# Altium PCB [R0] Digital - BlackChat.PcbDoc
Units mil, origin at the board's own origin, x right, y up, seen from the top; angles counter-clockwise.
Board outline 2400 x 3500 mil, 2 copper layers (Top Layer, Bottom Layer); 28 components, 77 nets, 205 pads, 9 vias.
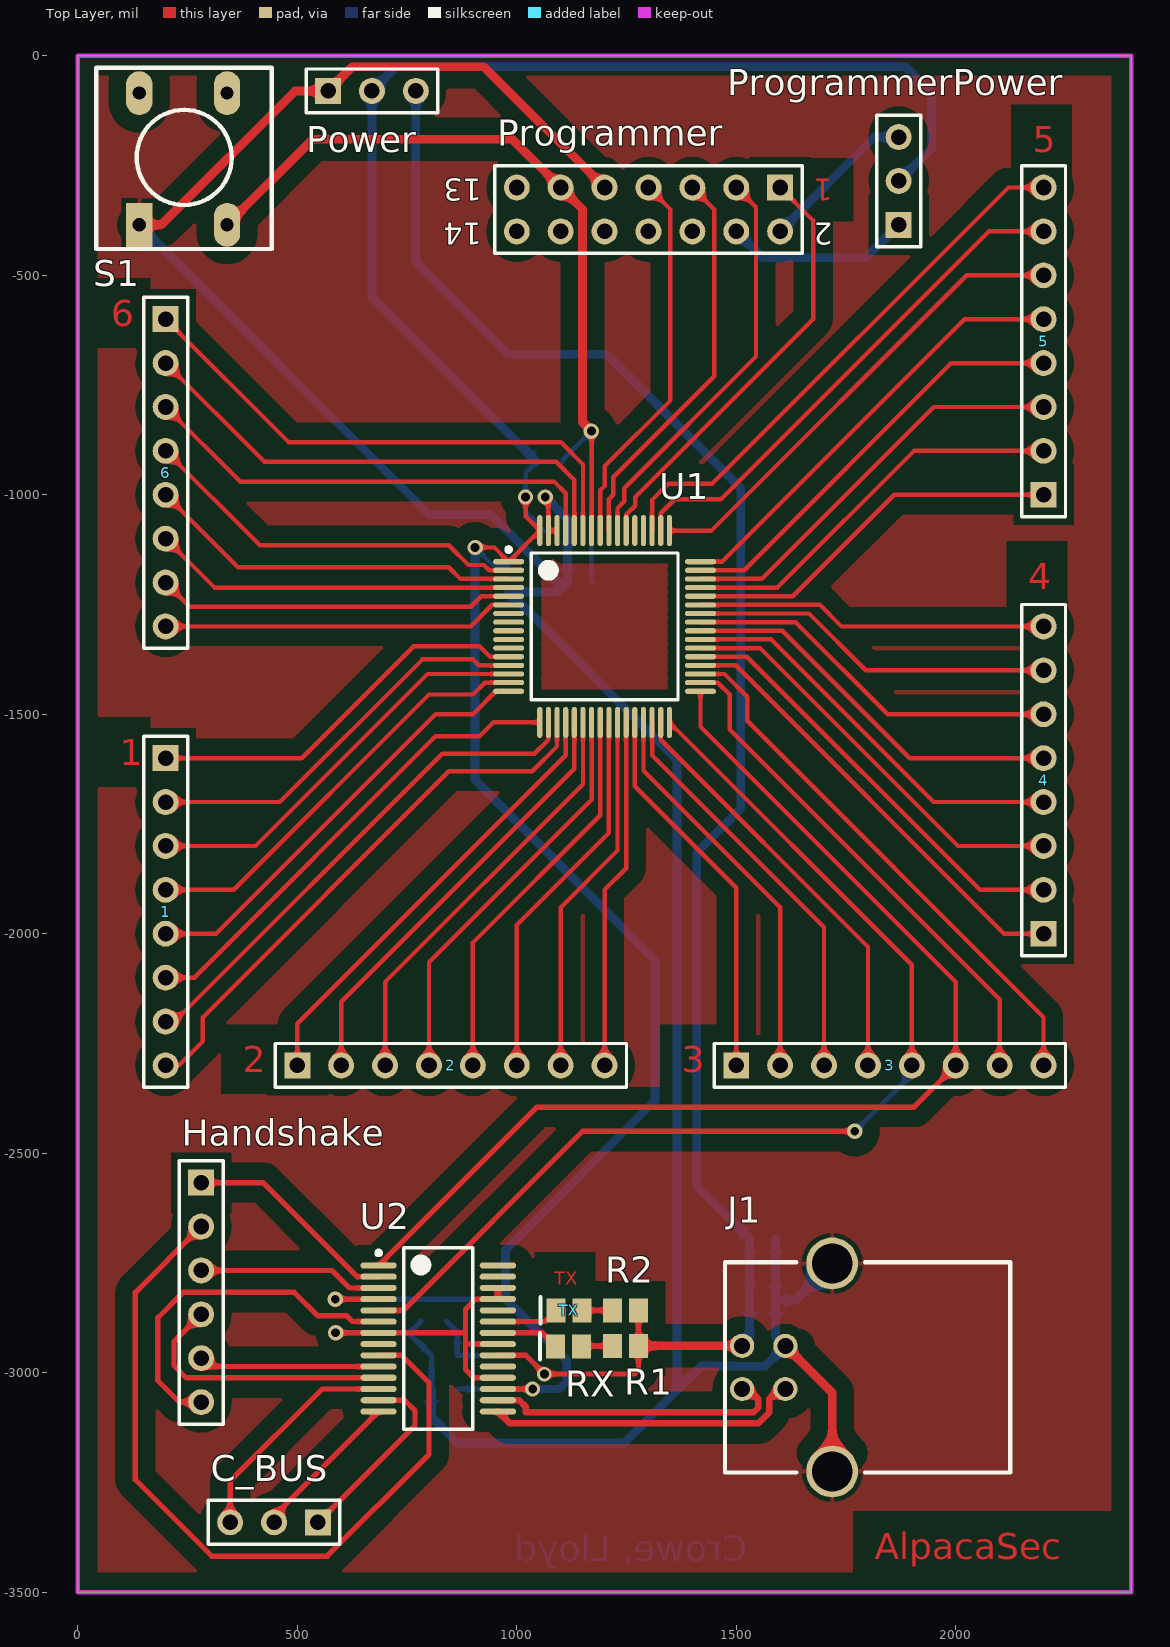
[diagram p0: Top Layer view]
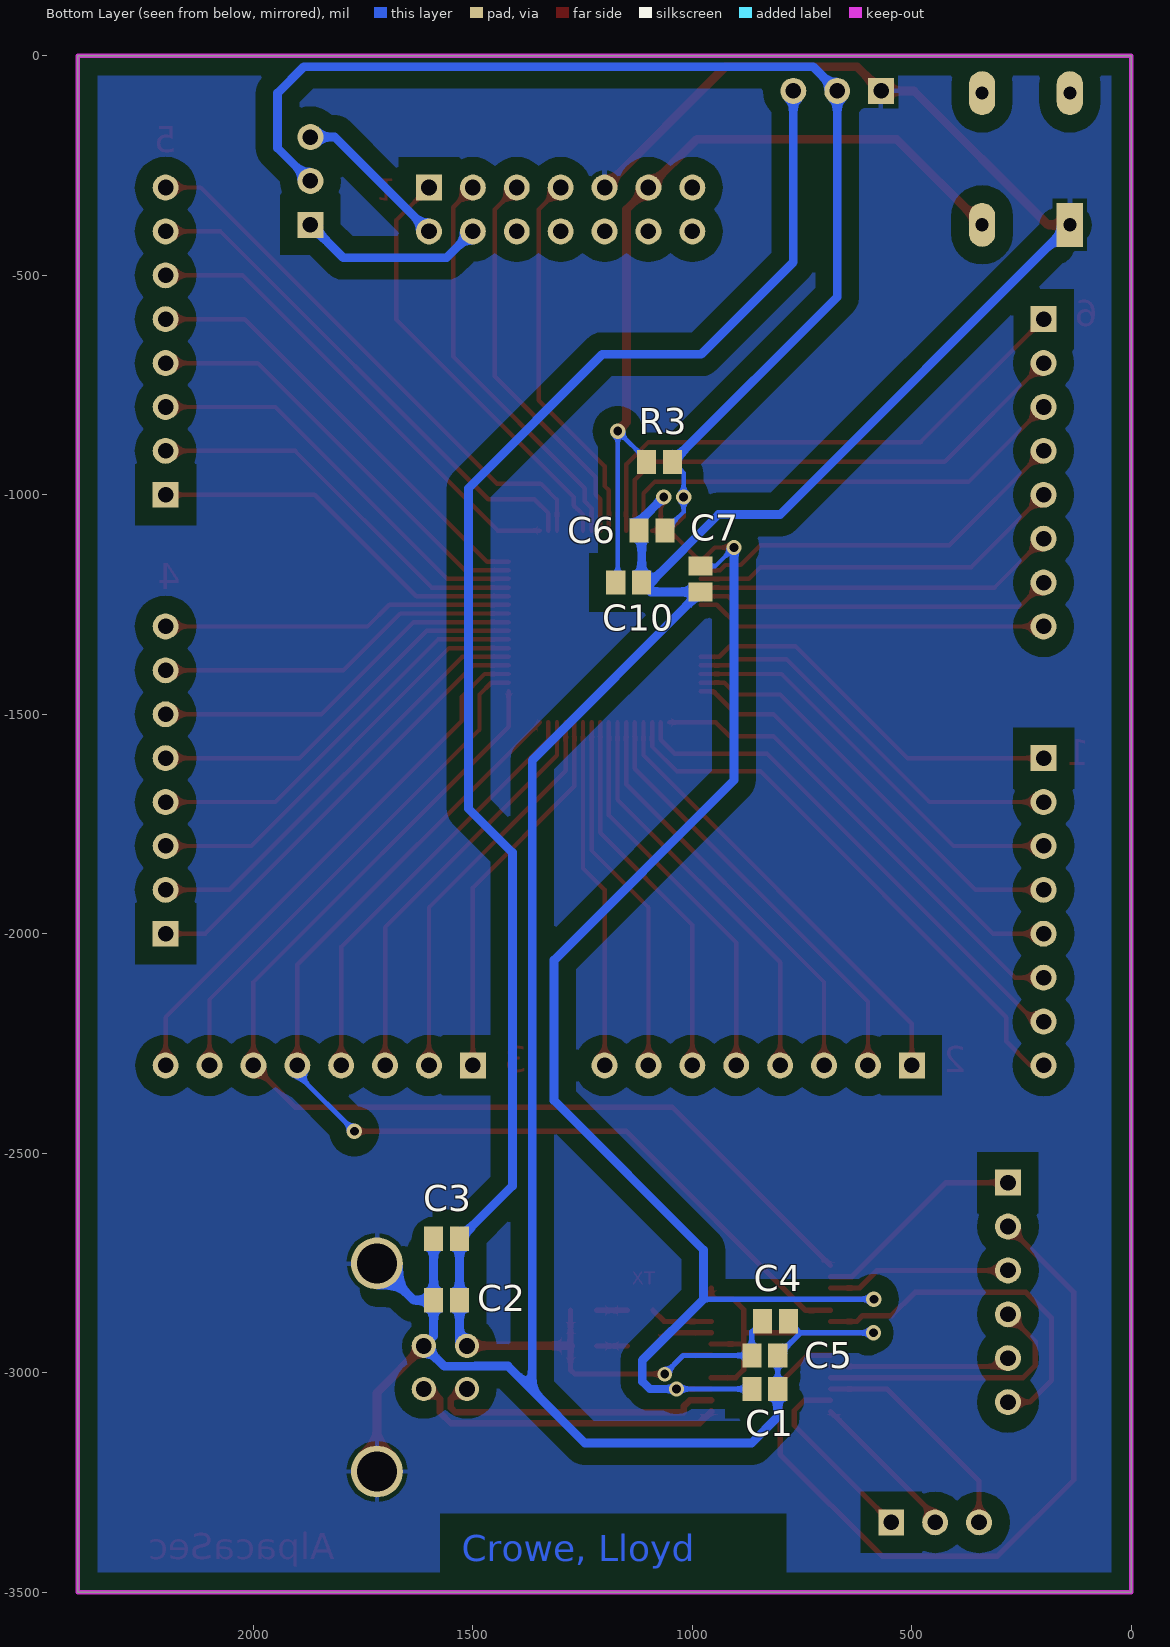
[diagram p1: Bottom Layer view, seen from below]

## Layer stack, top to bottom
Top Layer: signal copper 1.4
Dielectric: dielectric 12.6, FR-4, Dk 4.8
Bottom Layer: signal copper 1.4

## Board outline
0,0 2400,0 2400,-3500 0,-3500

## Design rules (kind name [scope] priority, off if disabled: settings)
Clearance Poly [InPolygon] p1: gap=40
Clearance Clearance_1 [InComponent('U1')] p2: gap=10
Clearance [All] p3: gap=8.5
DiffPairsRouting [All] p1: maxlimit=10 minlimit=10 mostfreqgap=10 maxuncoupledlength=500
HoleSize [All] p1: absolutevalues=TRUE maxlimit=100 minlimit=20 maxpercent=80.000 minpercent=20.000
PolygonConnect [All] p1: connectstyle=Relief reliefconductorwidth=10 reliefentries=4 polygonreliefangle="90 Angle" airgapwidth=10
RoutingVias [All] p1: holewidth=15 width=30 viastyle="Through Hole" minholewidth=10 minwidth=20 maxholewidth=15 maxwidth=30
SolderMaskExpansion [All] p1: expansion=4
Width [All] p1: maxlimit=20 minlimit=10 preferedwidth=20 minimp=50.000000 maximp=50.000000 favimp=50.000000
26 further rules are at their usual default settings.

## Classes and differential pairs
differential pair USB: +USB_DP -USB_DM

## Components (designator, comment, footprint, x,y, rotation, side; value= is the part's Value field where it differs from the comment)
1 "" HDR1X8 200,-1600 r270 top (schematic designator Port1)
2 "" HDR1X8 500,-2300 r0 top (schematic designator Port2)
3 "Header 8" HDR1X8 1500,-2300 r0 top (schematic designator Port3)
4 "Header 8" HDR1X8 2200,-2000 r90 top (schematic designator Port4)
5 "Header 8" HDR1X8 2200,-1000 r90 top (schematic designator Port5)
6 "Header 8" HDR1X8 200,-600 r270 top (schematic designator Port6)
C1 "Cap" CAP-0805 835,-3037 r180 bottom
C2 "Cap Pol3" CAP-0805 1560,-2835 r0 bottom
C3 "Cap" CAP-0805 1560,-2695 r180 bottom
C4 "Cap Pol3" CAP-0805 811,-2883 r180 bottom
C5 "Cap" CAP-0805 835,-2961 r0 bottom
C6 "Cap Pol3" CAP-0805 1091.73,-1081.5 r0 bottom
C7 "Cap" CAP-0805 981.5,-1191.73 r90 bottom
C10 "Cap" CAP-0805 1145,-1200 r0 bottom
C_BUS "Header 3" HDR1X3 547,-3341 r180 top
Handshake "Header 6" HDR1X6 281,-2567 r270 top
J1 "USB B" USB-B 1616,-2988 r90 top
Power "Header 3" HDR1X3 570,-80 r0 top
Programmer "Header 7X2" HDR2X7 1600,-300 r180 top
ProgrammerPower "Header 3" HDR1X3 1870,-385 r90 top
R1 "Res1" RES-0805 1248,-2939 r0 top
R2 "Res1" RES-0805 1248,-2858 r0 top
R3 "Res1" RES-0805 1075,-925 r180 bottom
RX "LED-BLUE" LED-0805 1118,-2940 r180 top
S1 "SW-PB" "SW PB" 140,-385 r90 top
TX "LED-ORANGE" LED-0805 1119,-2858 r180 top
U1 "MSP430F2617TPMR" TI-PM64_N 1200,-1300 r0 top
U2 "FT232RL-Reel" SSOP-28_N 821,-2922 r0 top

## Footprints (in the part's own frame and the unit in brackets; to place one, negate y for a bottom-side part, rotate by r counter-clockwise, add the part's x,y. Pads: shape width x height; smd on the part's side, far side on the other; paste and mask are expansions set on the pad)
CAP-0805 [mm] "Chip Capacitor, Body 2.0x1.3mm, IPC High Density"
  rect 1.1x1.4 smd: 1(-0.75,0) 2(0.75,0)
  body extent -1.1,-0.72 1.1,0.72, height 1.4
HDR1X3 [mm] "Connector; Header; 3 Position"
  rect 1.5x1.5 hole 0.9: 1(0,0)
  round 1.5 hole 0.9: 2(2.54,0) 3(5.08,0)
  silkscreen extent -1.27,-1.27 6.35,1.27
HDR1X6 [mm] "Connector; Header; 6 Position"
  rect 1.5x1.5 hole 0.9: 1(0,0)
  round 1.5 hole 0.9: 2(2.54,0) 3(5.08,0) 4(7.62,0) 5(10.16,0) 6(12.7,0)
  silkscreen extent -1.27,-1.27 13.97,1.27
HDR1X8 [mm] "Connector; Header; 8 Position"
  rect 1.5x1.5 hole 0.9: 1(0,0)
  round 1.5 hole 0.9: 2(2.54,0) 3(5.08,0) 4(7.62,0) 5(10.16,0) 6(12.7,0) 7(15.24,0) 8(17.78,0)
  silkscreen extent -1.27,-1.27 19.05,1.27
HDR2X7 [mm] "Connector; Header; 7x2 Position"
  rect 1.5x1.5 hole 0.9: 1(0,0)
  round 1.5 hole 0.9: 2(0,2.54) 3(2.54,0) 4(2.54,2.54) 5(5.08,0) 6(5.08,2.54) 7(7.62,0) 8(7.62,2.54) 9(10.16,0) 10(10.16,2.54) 11(12.7,0) 12(12.7,2.54) 13(15.24,0) 14(15.24,2.54)
  silkscreen extent -1.27,-1.27 16.51,3.81
LED-0805 [mm]
  rect 1.1x1.4 smd: 1(-0.75,0) 2(0.75,0)
  silkscreen extent 1.65,-0.76 1.65,0.76, body extent -1.1,-0.72 1.1,0.72, height 1.4
RES-0805 [mm] "Chip Resistor, Body 2.0x1.3mm, IPC High Density"
  rect 1.1x1.4 smd: 1(-0.75,0) 2(0.75,0)
  body extent -1.1,-0.72 1.1,0.72, height 1.4
SSOP-28_N [mm]
  oval 2.1x0.35 smd: 1(-3.45,4.225) 2(-3.45,3.575) 3(-3.45,2.925) 4(-3.45,2.275) 5(-3.45,1.625) 6(-3.45,0.975) 7(-3.45,0.325) 8(-3.45,-0.325) 9(-3.45,-0.975) 10(-3.45,-1.625) 11(-3.45,-2.275) 12(-3.45,-2.925) 13(-3.45,-3.575) 14(-3.45,-4.225) 15(3.45,-4.225) 16(3.45,-3.575) 17(3.45,-2.925) 18(3.45,-2.275) 19(3.45,-1.625) 20(3.45,-0.975) 21(3.45,-0.325) 22(3.45,0.325) 23(3.45,0.975) 24(3.45,1.625) 25(3.45,2.275) 26(3.45,2.925) 27(3.45,3.575) 28(3.45,4.225)
  silkscreen extent -3.57,-5.25 2,5.25, body extent -2.8,-5.25 2.8,5.25, height 2
"SW PB" [mil]
  rect 100x60 hole 30: 1(0,0)
  oval 100x60 hole 30: 2(0,-200) 3(300,-200) 4(300,0)
  silkscreen extent -55,-302 358,98
TI-PM64_N [mm] "QFP, 64-Leads, Body 10x10mm, Pitch 0.5mm, IPC Medium Density"
  oval 1.8x0.3 smd: 1(-5.55,3.75) 2(-5.55,3.25) 3(-5.55,2.75) 4(-5.55,2.25) 5(-5.55,1.75) 6(-5.55,1.25) 7(-5.55,0.75) 8(-5.55,0.25) 9(-5.55,-0.25) 10(-5.55,-0.75) 11(-5.55,-1.25) 12(-5.55,-1.75) 13(-5.55,-2.25) 14(-5.55,-2.75) 15(-5.55,-3.25) 16(-5.55,-3.75) 33(5.55,-3.75) 34(5.55,-3.25) 35(5.55,-2.75) 36(5.55,-2.25) 37(5.55,-1.75) 38(5.55,-1.25) 39(5.55,-0.75) 40(5.55,-0.25) 41(5.55,0.25) 42(5.55,0.75) 43(5.55,1.25) 44(5.55,1.75) 45(5.55,2.25) 46(5.55,2.75) 47(5.55,3.25) 48(5.55,3.75)
  oval 0.3x1.8 smd: 17(-3.75,-5.55) 18(-3.25,-5.55) 19(-2.75,-5.55) 20(-2.25,-5.55) 21(-1.75,-5.55) 22(-1.25,-5.55) 23(-0.75,-5.55) 24(-0.25,-5.55) 25(0.25,-5.55) 26(0.75,-5.55) 27(1.25,-5.55) 28(1.75,-5.55) 29(2.25,-5.55) 30(2.75,-5.55) 31(3.25,-5.55) 32(3.75,-5.55) 49(3.75,5.55) 50(3.25,5.55) 51(2.75,5.55) 52(2.25,5.55) 53(1.75,5.55) 54(1.25,5.55) 55(0.75,5.55) 56(0.25,5.55) 57(-0.25,5.55) 58(-0.75,5.55) 59(-1.25,5.55) 60(-1.75,5.55) 61(-2.25,5.55) 62(-2.75,5.55) 63(-3.25,5.55) 64(-3.75,5.55)
  silkscreen extent -5.67,-4.25 4.25,4.57, body extent -5,-5 5,5, height 1.6
USB-B [mm] "On Shore Technology USB-B1HSB6"
  round 3 hole 2.33: 0(-6.02,-2.605) 0(6.02,-2.605)
  round 1.397 hole 0.92: 1(1.25,2.605) 2(-1.25,2.605) 3(-1.25,0.105) 4(1.25,0.105)
  silkscreen extent -6.08,-12.9 6.08,3.6

## Part data
1 2: library part "Header 8", "Header, 8-Pin"
3 4 5 6: "Header, 8-Pin"
C1 C3 C5 C7 C10: "Capacitor"
C2 C4 C6: "Polarized Capacitor (Surface Mount)"
C_BUS Power ProgrammerPower: "Header, 3-Pin"
Handshake: "Header, 6-Pin"
J1: "On Shore Technology USB-B1HSB6"
Programmer: "Header, 7-Pin, Dual row"
R1 R2 R3: "Resistor"
RX TX: library part LED-GENERIC, "Light Emitting Diode"
S1: "DIGIKEY SW400-ND"
U1: "16 MHz Mixed Signal Microcontroller with 92 KB Flash, 8192 B SRAM and 48 GPIOs, -40 to 105 degC, 64-pin QFP (PM), Green (RoHS & no Sb/Br)"
U2: "USB UART Asynchronous Serial Data Transfer Chip, SSOP-28, Tape and Reel"

## Via types
v1: diameter 35, hole 20, Top Layer to Bottom Layer, 7 vias
v2: diameter 33, hole 20, Top Layer to Bottom Layer, 1 vias
v3: diameter 34, hole 20, Top Layer to Bottom Layer, 1 vias

## Nets (pads, with @x,y where several pads share a name; then routed paths per layer and width w, separated by ;. In a path a pad name is that pad's centre, name@x,y a point inside that pad or via, vN(x,y) a via of type N, cw(c..) or ccw(c..) an arc to the next point about the centre after c; other vN are vias at no path point)
3V3: C1.1 C6.1 C7.2 Power.2 ProgrammerPower.2 R3.2 U1.1 U1.64 U2.4 U2.17 | length 6204.7
  Top Layer w10: v1(905,-1120) 949.13,-1120 U1.1 U1.64 1020.87,-1050 1020,-1050 v1(1020,-1005)
  Top Layer w12: v1(586.43,-2832.43) U2.4 ; U2.17 v3(1036.16,-3037.16)
  Bottom Layer w10: v1(905,-1120) 947.2,-1162.2 C7.2 ; R3.2 1020,-950.47 v1(1020,-1005) 1020,-1039.29 C6.1
  Bottom Layer w12: v1(586.43,-2832.43) 974.57,-2832.43 ; C1.1 864.69,-3037.16 v3(1036.16,-3037.16)
  Bottom Layer w18: v3(1036.16,-3037.16) 1096.84,-3037.16
  Bottom Layer w19: 1096.84,-3037.16 1114,-3020
  Bottom Layer w20: v1(905,-1120) 905,-1650 1315,-2060 1315,-2380 974.57,-2720.43 974.57,-2832.43 1114,-2971.87 1114,-3020 ; R3.2 670,-549.53 Power.2 725,-25 1885,-25 1945,-85 1945,-210 ProgrammerPower.2
5V0: C2.1 C3.2 C4.1 C5.2 J1.1 Power.3 R1.2 R2.2 U2.20 | length 4413.1
  Top Layer w12: U2.20 1020.39,-2960.39 v2(1063,-3003) 1268,-3003 1277.53,-2993.47 R1.2 R2.2
  Top Layer w20: R1.2 1277.74,-2938.79 J1.1
  Bottom Layer w12: C4.1 864.53,-2907 C5.2 1021,-2961 v2(1063,-3003)
  Bottom Layer w20: Power.3 770,-470 980,-680 1205,-680 1510,-985 1510,-1715 1410,-1815 1410,-2574.53 C3.2 C2.1 1530.47,-2921.76 J1.1
GND: C1.2 C2.2 C3.1 C4.2 C5.1 C6.2 C7.1 C10.1 J1.0 J1.4 Power.1 Programmer.9 S1.1 U1.62 U1.63 U2.7 U2.18 U2.21 U2.25 U2.26 | length 7857.9
  Top Layer w10: v1(1065,-1005) 1072.05,-1012.05 U1.63 ; U1.63@1073.36,-1081.5 U1.62
  Top Layer w12: v1(587.2,-2909.2) U2.7 880.8,-2909.2 883,-2907 ; 884.8,-2934.8 U2.21 ; U2.18 901.43,-3011.57 883,-2993.13 883,-2907 ; U2.26 U2.25 906.57,-2832.43 883,-2856 883,-2907
  Top Layer w20: S1.1 190,-385 495,-80 Power.1 625,-25 925,-25 Programmer.9 ; J1.4 1718.56,-3045.48 J1.0@1718.56,-3225.01
  Bottom Layer w10: C6.2 C6.2@1121.26,-1061.26
  Bottom Layer w12: v1(587.2,-2909.2) 753.68,-2909.2 C5.1 C1.2 ; 755.27,-2909.2 C4.2
  Bottom Layer w20: S1.1 800,-1045 940.37,-1045 1095.37,-1200 C10.1 ; C1.2 805.47,-3100.47 865,-3160 1245,-3160 1365,-3040 ; v1(1065,-1005) C6.2@1121.26,-1061.26 ; C6.2 1115.47,-1087.28 C10.1 ; C3.1 C2.2 ; J1.0@1718.56,-2750.99 1634.55,-2835 C2.2 ; C10.1 1094.21,-1221.26 C7.1 1365,-1604.76 1365,-3040 ; 1365,-3040 1420,-2985 1493.89,-2985 1494.18,-2985.29 1565.37,-2985.29 J1.4 1589.53,-2916.45 C2.2
NetC_BUS_1: C_BUS.1 U2.13 | length 439
  Top Layer w12: C_BUS.1 768,-3120 768,-3086 744.75,-3062.75 U2.13
NetC_BUS_2: C_BUS.2 U2.14 | length 351.3
  Top Layer w12: C_BUS.2 447,-3326.51 U2.14
NetC_BUS_3: C_BUS.3 U2.12 | length 519.1
  Top Layer w12: C_BUS.3 347,-3247 556.84,-3037.16 U2.12
NetHandshake_1: Handshake.1 U2.2 | length 492.9
  Top Layer w12: Handshake.1 422,-2567 636.25,-2781.25 U2.2
NetHandshake_2: Handshake.2 U2.9 | length 1780.1
  Top Layer w12: Handshake.2 131,-2817 131,-3244 305,-3418 568,-3418 800,-3186 800,-3023 737.39,-2960.39 U2.9
NetHandshake_3: Handshake.3 U2.3 | length 420.7
  Top Layer w12: Handshake.3 579,-2767 618.84,-2806.84 U2.3
NetHandshake_4: Handshake.4 U2.11 | length 620.3
  Top Layer w12: Handshake.4 219,-2929 219,-2984 246.57,-3011.57 U2.11
NetHandshake_5: Handshake.5 U2.10 | length 412
  Top Layer w12: Handshake.5 299.98,-2985.98 U2.10
NetHandshake_6: Handshake.6 U2.6 | length 817.1
  Top Layer w12: Handshake.6 231,-3067 182,-3018 182,-2875 240,-2817 493,-2817 546,-2870 612,-2870 625.61,-2883.61 U2.6
NetR1_1: R1.1 RX.1 | length 69.9
  Top Layer w12: RX.1@1148.53,-2939 R1.1
NetR2_1: R2.1 TX.1 | length 69.9
  Top Layer w12: TX.1 R2.1
P1.0: 1.1 U1.12 | length 897
  Top Layer w10: 1.1 510,-1600 765,-1345 915,-1345 938.9,-1368.9 U1.12
P1.1: 1.2 U1.13 | length 921.7
  Top Layer w10: 1.2 460,-1700 785,-1375 900,-1375 913.58,-1388.58 U1.13
P1.2: 1.3 U1.14 | length 943.8
  Top Layer w10: 1.3 405,-1800 796.73,-1408.27 U1.14
P1.3: 1.4 U1.15 | length 977
  Top Layer w10: 1.4 355,-1900 800,-1455 900,-1455 927.05,-1427.95 U1.15
P1.4: 1.5 U1.16 | length 1010.3
  Top Layer w10: 1.5 315,-2000 815,-1500 900,-1500 952.36,-1447.64 U1.16
P1.5: 1.6 U1.17 | length 1093.2
  Top Layer w10: 1.6 265,-2100 815,-1550 915,-1550 946.5,-1518.5 U1.17
P1.6: 1.7 U1.18 | length 1177.4
  Top Layer w10: 1.7 220,-2200 830,-1590 1040,-1590 1072.05,-1557.95 U1.18
P1.7: 1.8 U1.19 | length 1279.7
  Top Layer w10: 1.8 230,-2300 285,-2245 285,-2190 845,-1630 1035,-1630 1091.73,-1573.27 U1.19
P2.0: 2.1 U1.20 | length 1034.8
  Top Layer w10: 2.1 500,-2205 1111.42,-1593.58 U1.20
P2.1: 2.2 U1.21 | length 1001.5
  Top Layer w10: 2.2 600,-2155 1131.1,-1623.9 U1.21
P2.2: 2.3 U1.22 | length 968.2
  Top Layer w10: 2.3 700,-2110 1150.79,-1659.21 U1.22
P2.3: 2.4 U1.23 | length 935
  Top Layer w10: 2.4 800,-2065 1170.47,-1694.53 U1.23
P2.4: 2.5 U1.24 | length 901.7
  Top Layer w10: 2.5 900,-2020 1190.16,-1729.84 U1.24
P2.5: 2.6 U1.25 | length 868.4
  Top Layer w10: 2.6 1000,-1980 1209.84,-1770.16 U1.25
P2.6: 2.7 U1.26 | length 835.1
  Top Layer w10: 2.7 1100,-1940 1229.53,-1810.47 U1.26
P2.7: 2.8 U1.27 | length 801.9
  Top Layer w10: 2.8 1200,-1900 1249.21,-1850.79 U1.27
P3.0: 3.1 U1.28 | length 877.2
  Top Layer w10: U1.28 1268.9,-1663.9 1500,-1895 3.1
P3.1: 3.2 U1.29 | length 910.5
  Top Layer w10: U1.29 1288.58,-1628.58 1600,-1940 3.2
P3.2: 3.3 U1.30 | length 943.8
  Top Layer w10: U1.30 1308.27,-1593.27 1700,-1985 3.3
P3.3: 3.4 U1.31 | length 977
  Top Layer w10: U1.31 1327.95,-1557.95 1800,-2030 3.4
P4.0: 4.1 U1.36 | length 1034.8
  Top Layer w10: U1.36 1498.58,-1388.58 2110,-2000 4.1
P4.1: 4.2 U1.37 | length 1001.5
  Top Layer w10: U1.37 1523.9,-1368.9 2055,-1900 4.2
P4.2: 4.3 U1.38 | length 968.2
  Top Layer w10: U1.38 1554.21,-1349.21 2005,-1800 4.3
P4.3: 4.4 U1.39 | length 935
  Top Layer w10: U1.39 1579.53,-1329.53 1950,-1700 4.4
P4.4: 4.5 U1.40 | length 901.7
  Top Layer w10: U1.40 1604.84,-1309.84 1895,-1600 4.5
P4.5: 4.6 U1.41 | length 868.4
  Top Layer w10: U1.41 1635.16,-1290.16 1845,-1500 4.6
P4.6: 4.7 U1.42 | length 835.1
  Top Layer w10: U1.42 1665.47,-1270.47 1795,-1400 4.7
P4.7: 4.8 U1.43 | length 801.9
  Top Layer w10: U1.43 1690.79,-1250.79 1740,-1300 4.8
P5.0: 5.1 U1.44 | length 877.2
  Top Layer w10: U1.44 1628.9,-1231.1 1860,-1000 5.1
P5.1: 5.2 U1.45 | length 910.5
  Top Layer w10: U1.45 1593.58,-1211.42 1905,-900 5.2
P5.2: 5.3 U1.46 | length 943.8
  Top Layer w10: U1.46 1558.27,-1191.73 1950,-800 5.3
P5.3: 5.4 U1.47 | length 977
  Top Layer w10: U1.47 1517.95,-1172.05 1990,-700 5.4
P5.4: 5.5 U1.48 | length 1010.3
  Top Layer w10: U1.48 1467.64,-1152.36 2020,-600 5.5
P5.5: 5.6 U1.49 | length 1093.2
  Top Layer w10: U1.49 1443.5,-1081.5 2025,-500 5.6
P5.6: 5.7 U1.50 | length 1177.4
  Top Layer w10: U1.50 1327.95,-1042.05 1360,-1010 1465,-1010 2075,-400 5.7
P5.7: 5.8 U1.51 | length 1256.3
  Top Layer w10: U1.51 1308.27,-1011.73 1345,-975 1445,-975 2120,-300 5.8
P6.0: 6.1 U1.59 | length 1238.5
  Top Layer w10: 6.1 480,-880 1100,-880 1150.79,-930.79 U1.59
P6.1: 6.2 U1.60 | length 1156.7
  Top Layer w10: 6.2 425,-925 1090,-925 1131.1,-966.1 U1.60
P6.2: 6.3 U1.61 | length 1077.9
  Top Layer w10: 6.3 370,-970 1085,-970 1111.42,-996.42 U1.61
P6.3: 6.4 U1.2 | length 894.2
  Top Layer w10: 6.4 415,-1115 845,-1115 890,-1160 925,-1160 937.05,-1172.05 U1.2
P6.4: 6.5 U1.3 | length 860.9
  Top Layer w10: 6.5 365,-1165 845,-1165 871.73,-1191.73 U1.3
P6.5: 6.6 U1.4 | length 827.6
  Top Layer w10: 6.6 311.42,-1211.42 U1.4
P6.6: 6.7 U1.5 | length 814.2
  Top Layer w10: 6.7 255,-1255 895,-1255 918.9,-1231.1 U1.5
P6.7: 6.8 U1.6 | length 801.9
  Top Layer w10: 6.8 895,-1300 944.21,-1250.79 U1.6
RX0: 3.6 U1.33 U2.1 | length 2596.8
  Top Layer w10: U1.33 1418.5,-1528.5 2000,-2110 3.6
  Top Layer w12: U2.1 1045.83,-2395 1905,-2395 3.6
RX1: 3.8 U1.35 | length 1247.5
  Top Layer w10: U1.35 1473.27,-1408.27 1525,-1460 1525,-1515 2200,-2190 3.8
RX_LED: RX.2 U2.22 | length 144.4
  Top Layer w12: U2.22 1057.68,-2909.2 RX.2
TCK: Programmer.7 U1.57 | length 868.4
  Top Layer w10: U1.57 1190.16,-989.84 1200,-980 1200,-935 1350,-785 1350,-350 Programmer.7
TDI: Programmer.3 U1.55 | length 930.8
  Top Layer w10: U1.55 1229.53,-1030.47 1245,-1015 1245,-985 1545,-685 1545,-345 Programmer.3
TDO: Programmer.1 U1.54 | length 989.4
  Top Layer w10: U1.54 1249.21,-1044.92 1261.07,-1033.06 1261.94,-1033.06 1270,-1025 1270,-1005 1675,-600 1675,-375 Programmer.1
TMS: Programmer.5 U1.56 | length 901.7
  Top Layer w10: U1.56 1209.84,-1010.16 1220,-1000 1220,-960 1450,-730 1450,-350 Programmer.5
TX0: 3.5 U1.32 U2.5 | length 2468
  Top Layer w10: U1.32 1900,-2070.87 3.5
  Top Layer w12: U2.5 741.98,-2858.02 1150,-2450 v1(1770,-2450)
  Bottom Layer w12: v1(1770,-2450) 1900,-2320 3.5
TX1: 3.7 U1.34 | length 1177.4
  Top Layer w10: U1.34 1457.95,-1427.95 1485,-1455 1485,-1535 2100,-2150 3.7
TX_LED: TX.2 U2.23 | length 143.3
  Top Layer w12: U2.23 1063.86,-2883.61 TX.2
URESETN: C10.2 Programmer.11 R3.1 S1.2 U1.58 | length 2141
  Top Layer w10: v1(1170,-855) 1170.47,-855.47 U1.58
  Top Layer w20: S1.2 535,-190 990,-190 Programmer.11 1150,-350 1150,-835 v1(1170,-855)
  Bottom Layer w10: R3.1 1104.53,-920.47 v1(1170,-855) 1170,-1195.47 C10.2
USB_DM: J1.2 U2.16 | length 682.2
  Top Layer w15: U2.16 1005.67,-3062.75 1020,-3077.08 1020,-3090 1540,-3090 1550,-3080 1550,-3060 1527.21,-3037.21 J1.2
USB_DP: J1.3 U2.15 | length 716.1
  Top Layer w15: U2.15 983.49,-3115 1550.36,-3115 1575,-3090.36 1575,-3060 1597.79,-3037.21 J1.3
VCC_TARGET: Programmer.4 ProgrammerPower.1 | length 425.9
  Bottom Layer w20: Programmer.4 1560,-460 1795,-460 ProgrammerPower.1
VCC_TOOL: Programmer.2 ProgrammerPower.3 | length 359.1
  Bottom Layer w20: Programmer.2 1815,-185 ProgrammerPower.3
XIN: U1.8
XOUT: U1.9
XT2IN: U1.53
XT2OUT: U1.52
pads on no net: Programmer.6 Programmer.8 Programmer.10 Programmer.12 Programmer.13 Programmer.14 S1.3 S1.4 U1.7 U1.10 U1.11 U2.8 U2.19 U2.24 U2.27 U2.28

## Polygon pours and split planes (outlines as drawn)
GND on Top Layer "Top Layer-GND" (solid, pour order 6): 0,0 2400,0 2400,-3500 0,-3500
GND on Bottom Layer "Bottom Layer-GND" (solid, pour order 5): 0,0 2400,0 2400,-3500 0,-3500

## Keep-outs
Keep-Out Layer:
  the board outline again, w10

## Other copper
Top Layer:
  text "AlpacaSec" at 1815,-3425 h60
Bottom Layer:
  text "Crowe, Lloyd" at 1525,-3430 h60

## Text inside footprints (layer, text, board x,y; h text height)
Programmer: Top Overlay "13" at 920,-280 h50 r180; Top Overlay "14" at 920,-380 h50 r180; Top Overlay "2" at 1720,-380 h50 r180; Top Layer "1" at 1720,-280 h50 r180